# Altium PCB ET4207_ANDROID.PcbDoc
Units mil, origin at the board's own origin, x right, y up, seen from the top; angles counter-clockwise.
Board outline 3108.03 x 2008.03 mil, 2 copper layers (Top Layer, Bottom Layer); 2 components, 29 nets, 60 pads, 0 vias.
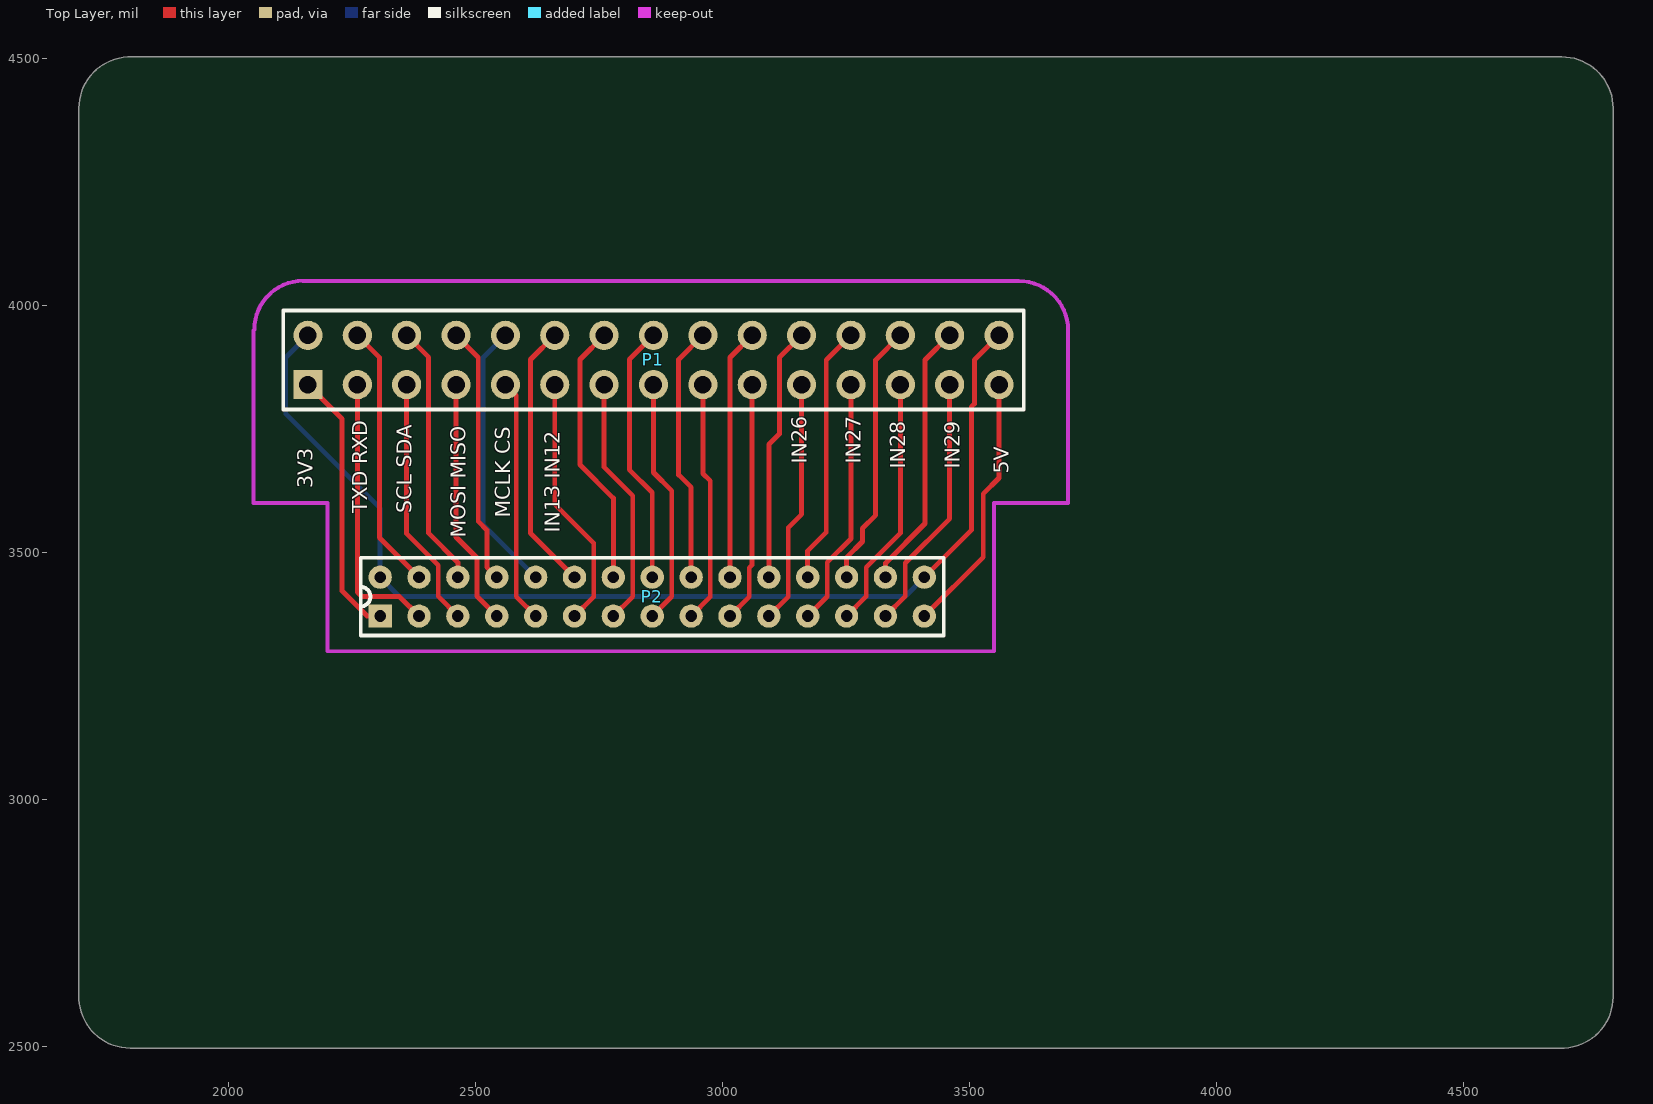
[diagram p0: Top Layer view]
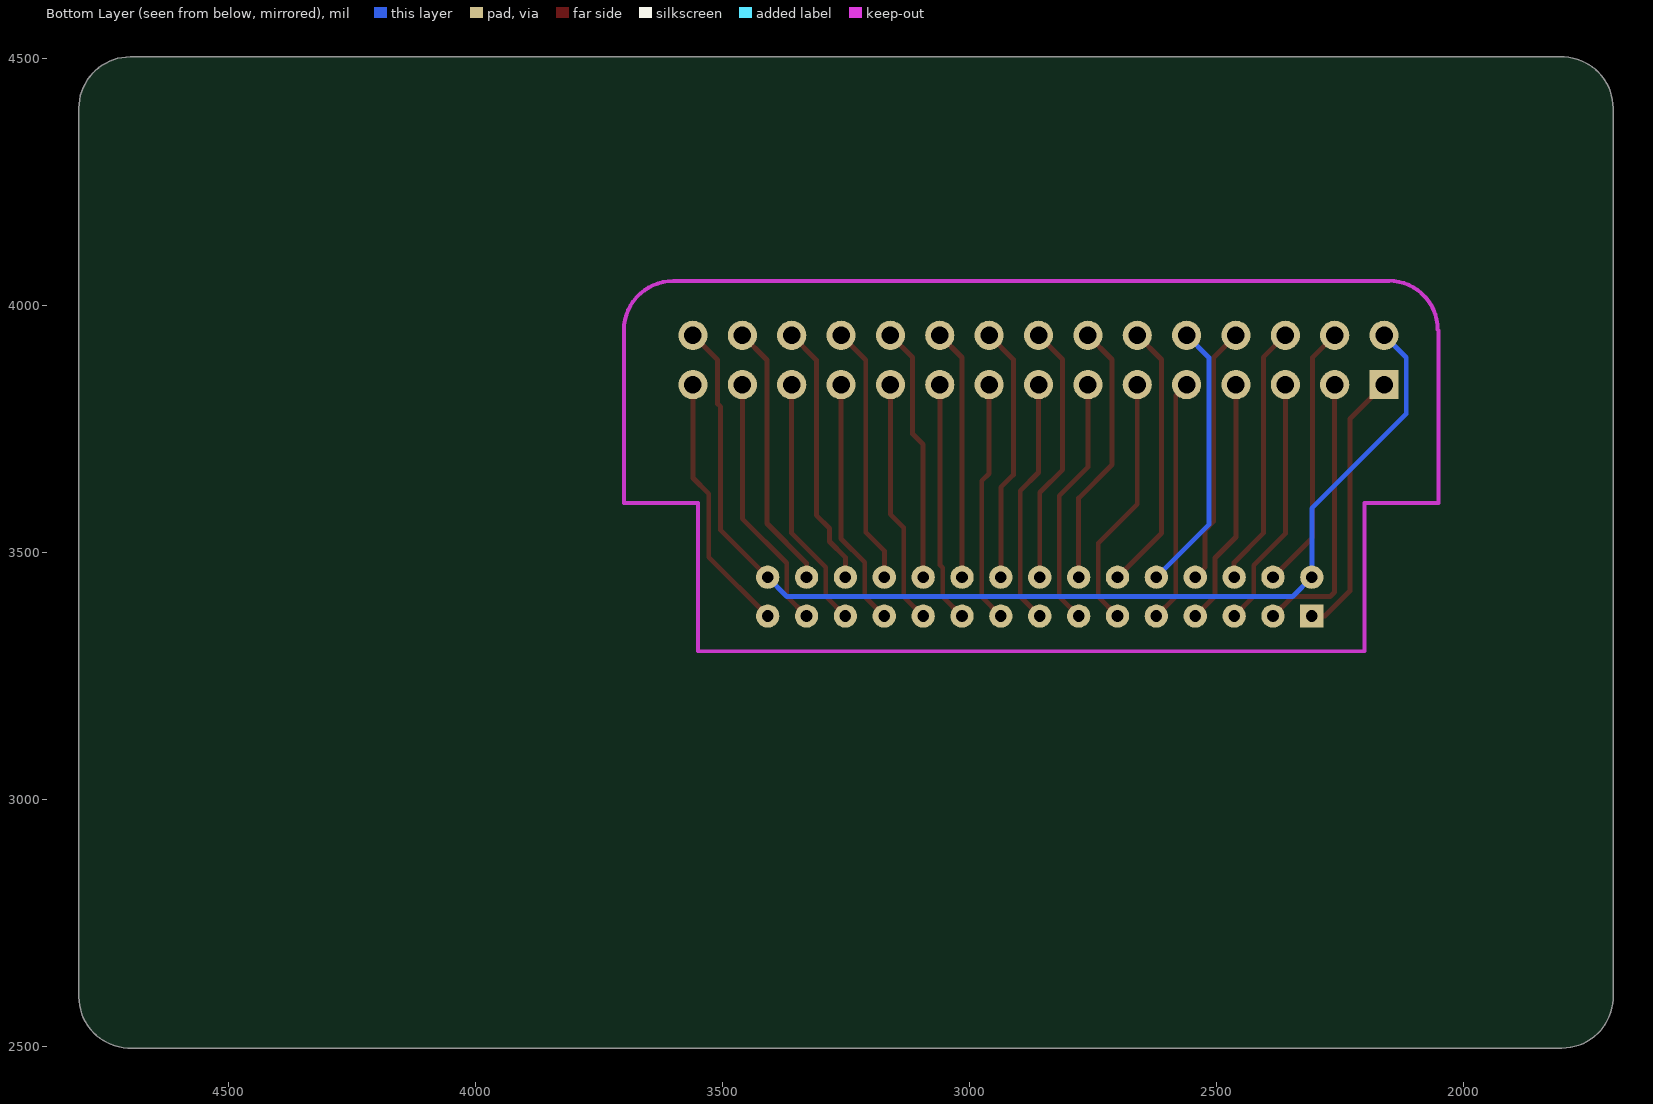
[diagram p1: Bottom Layer view, seen from below]

## Layer stack, top to bottom
Top Solder: solder mask 0.4, Solder Resist, Dk 3.5
Top Layer: signal copper 1.4
Dielectric 1: dielectric 12.6, FR-4, Dk 4.8
Bottom Layer: signal copper 1.4
Bottom Solder: solder mask 0.4, Solder Resist, Dk 3.5

## Board outline
1800,2495.99 cw(c1800,2600) 1696.05,2603.62 1696.05,4399.29 cw(c1700,4400) 1695.98,4400 cw(c1800,4400) 1803.62,4503.95 4699.29,4503.95 cw(c4700,4500) 4700,4504.02 cw(c4700,4400) 4804.02,4400 cw(c4700,4400) 4803.95,4396.38 4803.95,2600.71 cw(c4800,2600) 4804.02,2600 cw(c4700,2600) 4696.38,2496.05 1800.71,2496.05 cw(c1800,2500)

## Design rules (kind name [scope] priority, off if disabled: settings)
Clearance [All] p1: gap=10 ignorepadtopadclearanceinfootprint=FALSE
PolygonConnect [All] p1: connectstyle=Relief reliefconductorwidth=10 reliefentries=4 polygonreliefangle="90 Angle" airgapwidth=10
RoutingVias [All] p1: holewidth=20 width=35 viastyle="Through Hole" minholewidth=15 minwidth=25 maxholewidth=28 maxwidth=50
SolderMaskExpansion [All] p1: expansion=4
Width [All] p1: maxlimit=40 minlimit=8 preferedwidth=10
30 further rules are at their usual default settings.

## Components (designator, comment, footprint, x,y, rotation, side; value= is the part's Value field where it differs from the comment)
P1 "Header 15X2" HDR2X15 2160,3840 r0 top
P2 "Header 15X2" DIP30-2.0 2306.3,3371.26 r90 top

## Footprints (in the part's own frame and the unit in brackets; to place one, negate y for a bottom-side part, rotate by r counter-clockwise, add the part's x,y. Pads: shape width x height; smd on the part's side, far side on the other; paste and mask are expansions set on the pad)
DIP30-2.0 [mm]
  rect 1.2x1.2 hole 0.6: 1(0,0)
  round 1.2 hole 0.6: 2(2,0) 3(0,-2) 4(2,-2) 5(0,-4) 6(2,-4) 7(0,-6) 8(2,-6) 9(0,-8) 10(2,-8) 11(0,-10) 12(2,-10) 13(0,-12) 14(2,-12) 15(0,-14) 16(2,-14) 17(0,-16) 18(2,-16) 19(0,-18) 20(2,-18) 21(0,-20) 22(2,-20) 23(0,-22) 24(2,-22) 25(0,-24) 26(2,-24) 27(0,-26) 28(2,-26) 29(0,-28) 30(2,-28)
  silkscreen extent -1,-29 3,1
HDR2X15 [mm] "Connector; Header; 15x2 Position"
  rect 1.5x1.5 hole 0.9: 1(0,0)
  round 1.5 hole 0.9: 2(0,2.54) 3(2.54,0) 4(2.54,2.54) 5(5.08,0) 6(5.08,2.54) 7(7.62,0) 8(7.62,2.54) 9(10.16,0) 10(10.16,2.54) 11(12.7,0) 12(12.7,2.54) 13(15.24,0) 14(15.24,2.54) 15(17.78,0) 16(17.78,2.54) 17(20.32,0) 18(20.32,2.54) 19(22.86,0) 20(22.86,2.54) 21(25.4,0) 22(25.4,2.54) 23(27.94,0) 24(27.94,2.54) 25(30.48,0) 26(30.48,2.54) 27(33.02,0) 28(33.02,2.54) 29(35.56,0) 30(35.56,2.54)
  silkscreen extent -1.27,-1.27 36.83,3.81

## Part data
P1 P2: "Header, 15-Pin, Dual row", LatestRevisionDate=17-Jul-2002, LatestRevisionNote="Re-released for DXP Platform.", Publisher="Altium Limited"

## Nets (pads, with @x,y where several pads share a name; then routed paths per layer and width w, separated by ;. In a path a pad name is that pad's centre, name@x,y a point inside that pad or via, vN(x,y) a via of type N, cw(c..) or ccw(c..) an arc to the next point about the centre after c; other vN are vias at no path point)
3V3: P1.1 P2.1 | length 544.7
  Top Layer w10: P1.1 2229,3771 2229,3422.26 2280,3371.26 P2.1
5V: P1.29 P2.29 | length 531.4
  Top Layer w10: P2.29 3528,3490.6 3528,3619 3560,3651 P1.29
CLK1/IEMCLK: P1.25 P2.25 | length 513.8
  Top Layer w10: P2.25 3291,3411.08 3291,3470 3360,3539 P1.25
CS0: P1.10 P2.10 | length 552.7
  Bottom Layer w10: P1.10 2515,3895 2515,3556.26 P2.10
CS1/IEMDAT: P1.27 P2.27 | length 522.6
  Top Layer w10: P2.27 3370,3411.34 3370,3478.62 3460,3568.62 P1.27
EINT11: P1.16 P2.16 | length 529.5
  Top Layer w10: P2.16 2857.48,3621.52 2811,3668 2811,3891 P1.16
EINT12: P1.12 P2.12 | length 547.2
  Top Layer w10: P1.12 2611,3891 2611,3539 P2.12
EINT13: P1.11 P2.11 | length 517.6
  Top Layer w10: P1.11 2660,3598 2739,3519 2739,3410.26 P2.11
EINT26: P1.22 P2.22 | length 517.5
  Top Layer w10: P2.22 3093.7,3718.7 3115,3740 3115,3895 P1.22
EINT27: P1.24 P2.24 | length 526.3
  Top Layer w10: P2.24 3172.44,3503.22 3210,3540.77 3210,3890 P1.24
EINT28: P1.26 P2.26 | length 535.1
  Top Layer w10: P2.26 3251.18,3490.06 3283.31,3522.19 3283.31,3548.88 3310,3575.57 3310,3890 P1.26
EINT29: P1.28 P2.28 | length 543.9
  Top Layer w10: P2.28 3329.92,3478.54 3410,3558.62 3410,3890 P1.28
GND: P1.2 P1.30 P2.2 P2.30 | length 2275.2
  Top Layer w10: P2.30 3504,3545.34 3504,3795 3510,3801 3510,3890 P1.30
  Bottom Layer w10: P1.2 2115,3895 2115,3781 2306.3,3589.7 P2.2 2345.3,3411 3369.66,3411 P2.30
I2C0_SCL: P1.5 P2.5 | length 511.7
  Top Layer w10: P1.5 2360,3538 2424,3474 2424,3411.04 P2.5
I2C0_SDA: P1.6 P2.6 | length 533
  Top Layer w10: P1.6 2404.53,3895.47 2404.53,3539.04 2463.78,3479.78 P2.6
MCLK: P1.9 P2.9 | length 494.1
  Top Layer w10: P1.9 2582,3818 2582,3410.52 P2.9
MISO0: P1.8 P2.8 | length 524.2
  Top Layer w10: P1.8 2505,3895 2505,3563 2522.4,3545.6 2522.4,3470.12 P2.8
MISO1/I2C5SDA: P1.21 P2.21 | length 496.2
  Top Layer w10: P2.21 3133,3410.56 3133,3550.44 3160,3577.44 P1.21
MMC3CD: P1.15 P2.15 | length 500.4
  Top Layer w10: P2.15 2897,3410.78 2897,3625 2860,3662 P1.15
MMC3CLK: P1.13 P2.13 | length 509
  Top Layer w10: P1.13 2760,3673 2818,3615 2818,3410.52 P2.13
MMC3CMD: P1.14 P2.14 | length 538.4
  Top Layer w10: P1.14 2711,3891 2711,3678 2778.74,3610.26 P2.14
MMCDATA0: P1.17 P2.17 | length 491
  Top Layer w10: P2.17 2975,3410.04 2975,3645 2960,3660 P1.17
MMCDATA1: P1.18 P2.18 | length 520.7
  Top Layer w10: P2.18 2936.22,3632 2911,3657.22 2911,3891 P1.18
MMCDATA2: P1.19 P2.19 | length 487.4
  Top Layer w10: P2.19 3054,3410.3 3054,3469 3060,3475 P1.19
MMCDATA3: P1.20 P2.20 | length 508.7
  Top Layer w10: P2.20 3014.96,3894.96 P1.20
MOSI0: P1.7 P2.7 | length 502.9
  Top Layer w10: P1.7 2460,3531.4 2502.4,3489 2502.4,3411.38 P2.7
MOSI1/I2C5SCL: P1.23 P2.23 | length 505
  Top Layer w10: P2.23 3212,3410.82 3212,3480 3260,3528 P1.23
RXD2: P1.4 P2.4 | length 541.8
  Top Layer w10: P1.4 2304.53,3895.47 2304.53,3530.51 P2.4
TXD2: P1.3 P2.3 | length 565.2
  Top Layer w10: P1.3 2260,3420 2269,3411 2345.3,3411 P2.3

## Keep-outs
Keep-Out Layer:
  lines w7.87: 2050,3950 2050,3600 2200,3600 2200,3300 3550,3300 3550,3600 3700,3600 3700,3950 ; 2150,4050 3600,4050
  lines w8: -1329.5,2529.95 ccw(c-1230,2520) -1230,2420 ; -1259.5,2579.95 ccw(c-1160,2570) -1160,2470 ; -1079.5,2279.95 ccw(c-980,2270) -980,2170 ; 2051.42,3951.73 cw(c2150.17,3951.73) 2160,4050 ; 3600,4050 cw(c3600,3950) 3699.5,3940.05

## Silkscreen, mask and mechanical layers (free items; w line width, h text height)
Top Overlay:
  text "IN26" at 3170,3680 h30 r90
  text "IN27" at 3280,3680 h30 r90
  text "IN28" at 3370,3670 h30 r90
  text "IN29" at 3480,3670 h30 r90
  text "5V" at 3580,3660 h30 r90
  text "3V3" at 2170,3630 h30 r90
  text "TXD RXD" at 2280,3580 h30 r90
  text "SCL SDA" at 2370,3580 h30 r90
  text "MCLK CS" at 2570,3570 h30 r90
  text "IN13 IN12" at 2670,3540 h30 r90
  text "MOSI MISO" at 2480,3530 h30 r90